# EAGLE board MPU-9250-mbed_rev03_FDZ (EAGLE 9.2.2)
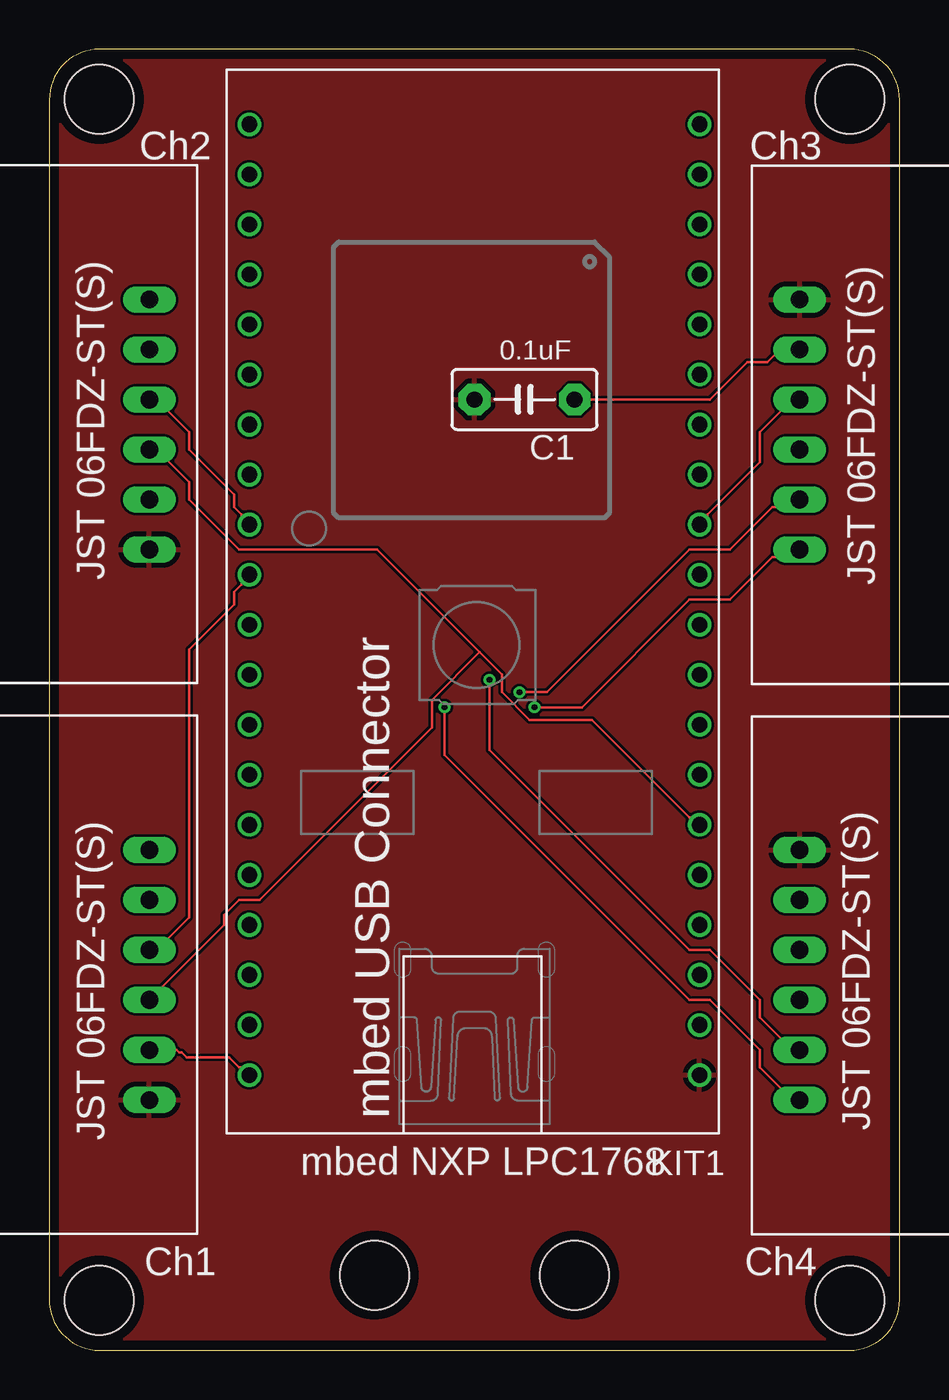
[diagram p0: board, top side]
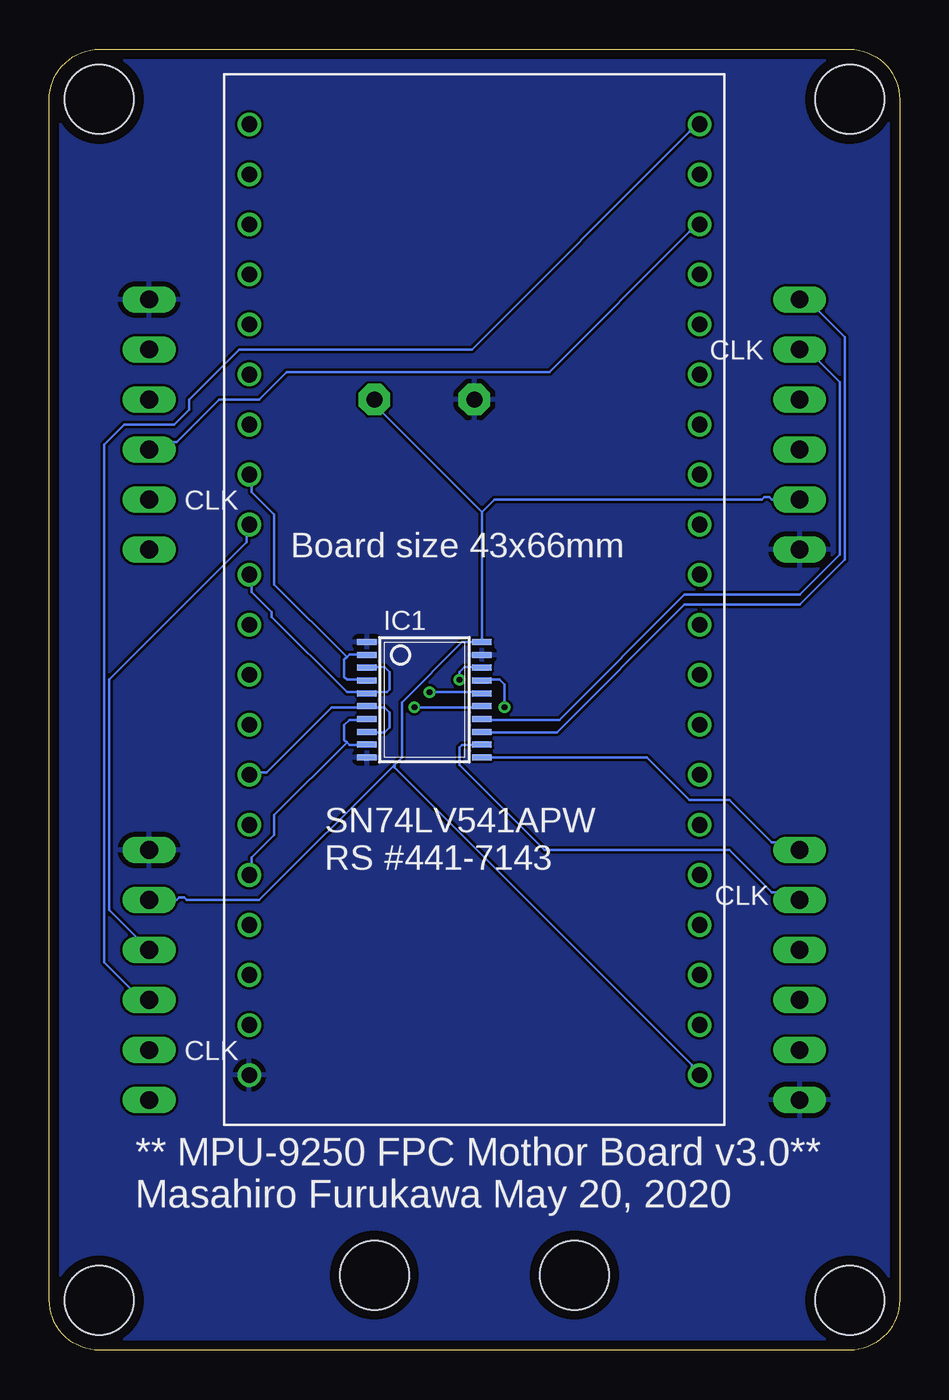
[diagram p1: board, bottom side, seen from below]

Size 43.17 x 66.04 mm. Coordinates in mm from the lower left corner, seen from the top.
Outline: 0,63.48 0,2.56 arc90 2.54,0 40.63,0 arc90 43.17,2.56 43.17,63.48 arc90 40.63,66.04 2.54,66.04 arc90 0,63.48
Copper layers (1+2*15+16): Top 0.018mm / dielectric 0.25mm / Route2 0.035mm / dielectric 1mm / Route15 0.035mm / dielectric 0.25mm / Bottom 0.018mm
Design rules "pban_5mil-l4": minimum track width 5mil, minimum drill 0.3mm, track to track 5mil, track to pad 0.229mm, pad to pad 5mil, via to via 5mil, smd to smd 5mil, copper to edge 0.5mm, drill to drill 0.5mm, minimum pad ring 0.15mm, minimum via ring 0.15mm, stop-mask expansion 4mil, vias tented up to drill 0.35mm, thermal gap 10mil
Holes 3.5 mm at 2.54,2.54 2.54,63.5 40.64,63.5 40.64,2.54 16.51,3.81 26.67,3.81

## Footprints (pad centres in the part's own frame; a part is rotated, then mirrored left to right if it is on the bottom)
C5B3 = drill 0.813 pad 1.6 octagon: 1 -2.54,0; 2 2.54,0
TSSOP20 = smd 0.305 x 0.991: 1 -2.925,-2.918; 2 -2.275,-2.918; 3 -1.625,-2.918; 4 -0.975,-2.918; 5 -0.325,-2.918; 6 0.325,-2.918; 7 0.975,-2.918; 8 1.625,-2.918; 9 2.275,-2.918; 10 2.925,-2.918; 11 2.925,2.918; 12 2.275,2.918; 13 1.625,2.918; 14 0.975,2.918; 15 0.325,2.918; 16 -0.325,2.918; 17 -0.975,2.918; 18 -1.625,2.918; 19 -2.275,2.918; 20 -2.925,2.918
MBED-KIT = drill 0.8: D+ 11.43,1.27; D- 11.43,3.81; GND -11.43,24.13; IF+ 11.43,16.51; IF- 11.43,19.05; NR -11.43,16.51; P$5 -11.43,13.97; P$6 -11.43,11.43; P$7 -11.43,8.89; P$8 -11.43,6.35; P$9 -11.43,3.81; P$10 -11.43,1.27; P$11 -11.43,-1.27; P$12 -11.43,-3.81; P$13 -11.43,-6.35; P$14 -11.43,-8.89; P$15 -11.43,-11.43; P$16 -11.43,-13.97; P$17 -11.43,-16.51; P$18 -11.43,-19.05; P$19 -11.43,-21.59; P$20 -11.43,-24.13; P$21 11.43,-24.13; P$22 11.43,-21.59; P$23 11.43,-19.05; P$24 11.43,-16.51; P$25 11.43,-13.97; P$26 11.43,-11.43; P$27 11.43,-8.89; P$28 11.43,-6.35; P$29 11.43,-3.81; P$30 11.43,-1.27; RD+ 11.43,11.43; RD- 11.43,13.97; TD+ 11.43,6.35; TD- 11.43,8.89; VB -11.43,19.05; VIN -11.43,21.59; VOUT 11.43,24.13; VU 11.43,21.59
06FDZ-ST(S) = drill 0.9 long: P$1 -6.35,0; P$2 -3.81,0; P$3 -1.27,0; P$4 1.27,0; P$5 3.81,0; P$6 6.35,0

## Placement (x,y rotation side)
C1  0.1u  [C5B3]  24.13,48.26 180 top
IC1  74541PW  [TSSOP20]  24.13,33.02 270 bottom
KIT1  MBED_NXP_LPC1768  [MBED-KIT]  21.59,38.1 180 top
U$1  06FDZ-ST(S)  [06FDZ-ST(S)]  5.08,19.05 90 top
U$2  06FDZ-ST(S)  [06FDZ-ST(S)]  5.08,46.99 90 top
U$3  06FDZ-ST(S)  [06FDZ-ST(S)]  38.1,46.99 270 top
U$4  06FDZ-ST(S)  [06FDZ-ST(S)]  38.1,19.05 270 top

## Library data of the parts
C1 = capacitor-wima
IC1 = 74xx-us
KIT1 = MBED_v2.1
U$1-U$4 = JST-con-FDZ

## Nets
->CLK_SPI1->: IC1.6 IC1.8 KIT1.P$7
->CLK_SPI2->: IC1.2 IC1.4 KIT1.P$13
->MOSI_SPI1->: IC1.7 IC1.9 KIT1.P$5
->MOSI_SPI2->: IC1.3 IC1.5 KIT1.P$11
<-MISO_SPI1<-: KIT1.P$6 U$1.P$3 U$2.P$3
<-MISO_SPI2<-: KIT1.P$12 U$3.P$3 U$4.P$3
CON1_CLK_SPI1: IC1.12 U$1.P$5
CON1_MOSI_SPI1: IC1.11 U$1.P$6
CON2_CLK_SPI1: IC1.14 U$2.P$5
CON2_MOSI_SPI1: IC1.13 U$2.P$6
CON3_CLK_SPI2: IC1.16 U$3.P$5
CON3_MOSI_SPI2: IC1.15 U$3.P$6
CON4_CLK_SPI2: IC1.18 U$4.P$5
CON4_MOSI_SPI2: IC1.17 U$4.P$6
GND: C1.2 IC1.1 IC1.10 IC1.19 KIT1.GND U$1.P$1 U$2.P$1 U$3.P$1 U$4.P$1
NR: KIT1.NR
VB: KIT1.VB
VDD: C1.1 IC1.20 KIT1.VOUT U$1.P$2 U$2.P$2 U$3.P$2 U$4.P$2
VIN: KIT1.VIN
VU: KIT1.VU
~CS1: KIT1.P$30 U$1.P$4
~CS2: KIT1.P$29 U$2.P$4
~CS3: KIT1.P$23 U$3.P$4
~CS4: KIT1.P$21 U$4.P$4

## Tracks (layer width: path | path; a pad name or v marks a point on that pad's centre or on a via)
->CLK_SPI1->
  Bottom 0.127: IC1.8 26.92,31.37 26.16,31.37 25.91,31.62 25.91,32.38 26.16,32.64 26.92,32.64 IC1.6 27.05,32.64 28.83,32.64 32.13,29.34 32.89,29.34 KIT1.P$7
->CLK_SPI2->
  Bottom 0.127: 28.07,35.18 27.94,35.31 IC1.2 | 28.07,35.18 28.19,35.05 28.19,34.16 28.07,34.04 27.05,34.04 IC1.4 | 28.07,35.18 31.75,38.86 31.75,42.42 32.89,43.56 32.89,44.32 KIT1.P$13
->MOSI_SPI1->
  Bottom 0.127: 28.07,30.86 28.19,30.99 28.19,31.75 27.94,32 27.05,32 IC1.7 | 28.07,30.86 27.94,30.73 27.05,30.73 IC1.9 | 28.07,30.86 31.75,27.18 31.75,26.16 32.89,25.02 32.89,24.26 KIT1.P$5
->MOSI_SPI2->
  Bottom 0.127: IC1.3 26.92,34.67 26.16,34.67 25.91,34.42 25.91,33.53 26.03,33.4 26.92,33.4 IC1.5 27.05,33.4 28.07,33.4 31.88,37.21 31.88,37.47 32.89,38.48 32.89,39.24 KIT1.P$11
<-MISO_SPI1<-
  Top 0.127: KIT1.P$6 32.64,27.05 32.51,27.05 27.56,32 24.38,32 22.99,33.4 22.99,34.29 21.84,35.43 | 21.84,35.43 16.64,40.64 9.65,40.64 7.11,43.18 7.11,44.07 5.46,45.72 U$2.P$3 | U$1.P$3 8.89,21.59 8.89,22.1 9.65,22.86 10.67,22.86 19.43,31.62 19.43,33.02 21.84,35.43
<-MISO_SPI2<-
  Top 0.127: KIT1.P$12 33.4,42.29 33.4,42.42 36.07,45.09 36.07,46.61 37.72,48.26 U$3.P$3
  Bottom 0.127: U$4.P$3 40.13,22.35 40.13,34.04 33.15,41.02 33.15,41.78 KIT1.P$12
CON1_CLK_SPI1
  Bottom 0.127: U$1.P$5 5.46,23.24 6.48,23.24 8.64,25.4 18.03,25.4 22.35,29.72 22.35,30.61 22.22,30.73 21.34,30.73 IC1.12
CON1_MOSI_SPI1
  Bottom 0.127: U$1.P$6 5.46,25.78 6.48,25.78 8.64,27.94 10.67,27.94 12.83,30.1 IC1.11
CON2_CLK_SPI1
  Bottom 0.127: U$2.P$5 4.7,50.8 3.05,49.15 3.05,40.39 5.08,38.35 10.92,38.35 17.27,32 21.21,32 IC1.14
CON2_MOSI_SPI1
  Bottom 0.127: U$2.P$6 4.7,53.34 2.79,51.44 2.79,40.13 5.08,37.85 10.92,37.85 17.4,31.37 21.21,31.37 IC1.13
CON3_CLK_SPI2  (via drill 0.3)
  Top 0.127: v23.88,33.4 25.27,33.4 32.51,40.64 34.54,40.64 36.7,42.8 37.72,42.8 U$3.P$5
  Bottom 0.127: v23.88,33.4 21.34,33.4 IC1.16
CON3_MOSI_SPI2  (via drill 0.3)
  Top 0.127: v24.64,32.64 27.05,32.64 32.51,38.1 34.54,38.1 36.7,40.26 37.72,40.26 U$3.P$6
  Bottom 0.127: v24.64,32.64 21.34,32.64 IC1.15
CON4_CLK_SPI2  (via drill 0.3)
  Top 0.127: v22.35,34.04 22.35,30.48 32.51,20.32 33.53,20.32 36.07,17.78 36.07,16.89 37.72,15.24 U$4.P$5
  Bottom 0.127: v22.35,34.04 22.35,34.42 22.1,34.67 21.34,34.67 IC1.18
CON4_MOSI_SPI2  (via drill 0.3)
  Top 0.127: v20.07,32.64 20.07,30.23 32.51,17.78 33.53,17.78 36.07,15.24 36.07,14.35 37.72,12.7 U$4.P$6
  Bottom 0.127: v20.07,32.64 20.07,33.78 20.32,34.04 21.21,34.04 IC1.17
GND
  pour Top: 0,66.04 43.18,66.04 43.18,0 2.54,0 arc-90 0,2.54
  pour Bottom: 0,66.04 40.64,66.04 arc-90 43.18,63.5 43.18,0 2.54,0 arc-90 0,2.54
VDD
  Top 0.127: KIT1.VOUT 9.78,14.35 9.65,14.35 9.14,14.86 6.98,14.86 6.73,15.11 6.6,15.11 6.48,15.24 U$1.P$2 | U$3.P$2 37.08,50.8 36.45,50.16 35.43,50.16 33.53,48.26 C1.1
  Bottom 0.127: 21.21,42.55 21.21,36.07 IC1.20 21.34,35.94 22.22,35.94 25.27,32.89 25.27,30.1 25.65,29.72 | 21.21,42.55 26.67,48.01 C1.1 | U$2.P$2 6.48,43.18 6.6,43.31 6.86,43.31 6.98,43.18 20.57,43.18 21.21,42.55 | U$4.P$2 36.7,22.86 36.58,22.99 36.32,22.99 36.19,22.86 32.51,22.86 25.65,29.72 | KIT1.VOUT 10.54,14.35 10.54,14.48 25.65,29.59 25.65,29.72
~CS1
  Top 0.127: KIT1.P$30 9.78,38.99 9.78,38.86 9.4,38.48 9.4,37.85 7.11,35.56 7.11,21.97 5.46,20.32 U$1.P$4
~CS2
  Top 0.127: KIT1.P$29 9.78,42.29 9.78,42.42 9.4,42.8 9.4,43.43 7.11,45.72 7.11,46.61 5.46,48.26 U$2.P$4
~CS3
  Bottom 0.127: KIT1.P$23 10.54,56.77 10.67,56.77 17.78,49.66 31.11,49.66 32.51,48.26 34.54,48.26 36.7,46.1 37.72,46.1 U$3.P$4
~CS4
  Bottom 0.127: KIT1.P$21 10.54,61.85 10.67,61.85 21.72,50.8 33.53,50.8 36.07,48.26 36.07,47.75 36.83,46.99 39.37,46.99 40.39,45.97 40.39,19.68 38.48,17.78 U$4.P$4

## Text on the board
tPlace: Ch2 | Ch3 | 0.1uF | JST 06FDZ-ST(S) | JST 06FDZ-ST(S) | mbed USB Connector | JST 06FDZ-ST(S) | JST 06FDZ-ST(S) | mbed NXP LPC1768 | Ch1 | Ch4
bPlace: CLK | CLK | Board size 43x66mm | SN74LV541APW / RS #441-7143 | CLK | CLK | ** MPU-9250 FPC Mothor Board v3.0** / Masahiro Furukawa May 20, 2020